# Allegro board JW3651.brd
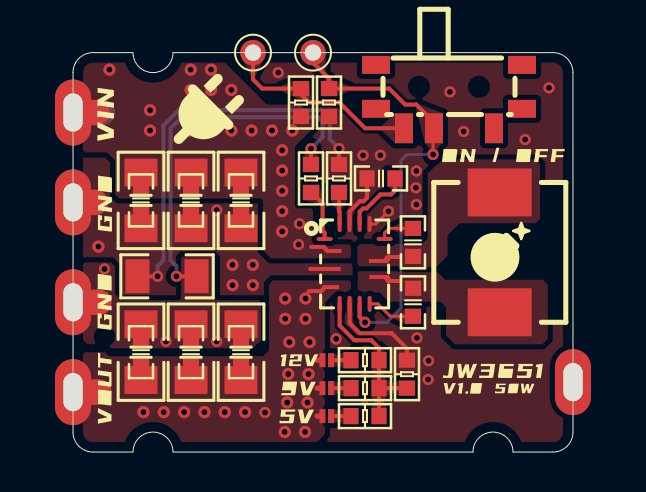
[diagram p0: board, top side]
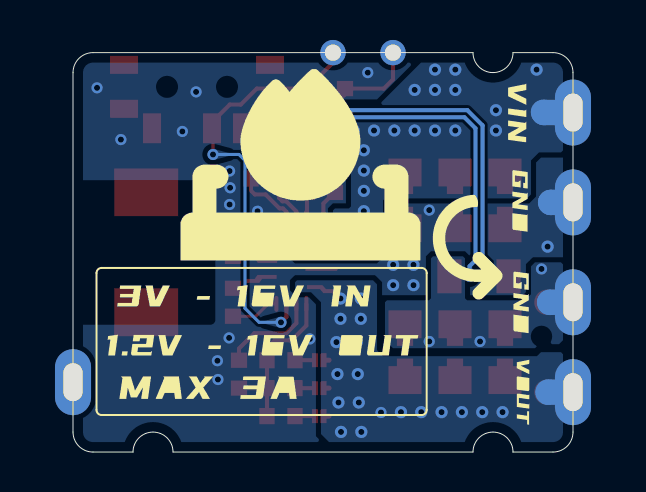
[diagram p1: board, bottom side, seen from below]

Outline 25 x 20 mm; copper layers: TOP, BOTTOM. Coordinates in mm from the lower left corner of the outline.
Outline path: 0,19 arc(0.29,19.71) 1,20 3,20 arc(4,19) 5,20 24,20 arc(24.71,19.71) 25,19 25,1 arc(24.71,0.29) 24,0 22,0 arc(21,1) 20,0 5,0 arc(4,1) 3,0 1,0 arc(0.29,0.29) 0,1 0,19

## Design rules (mm)
constraint set DEFAULT: min track width 0.152
net group N738676: nets N738700 N738731
net group N741418: nets N741418 N741422 N741426 N741599

## Placement (name value [footprint] x y rotation side)
C1  0.1uF  [C0603]  17 7.5 270 top
C2  0.1uF  [C0603]  17 10.5 270 top
C5  22uF  [C1206]  3.4 5 270 top
C6  22uF  [C1206]  5.9 5 270 top
C7  0.1uF  [C0603]  5.9 5 270 top
C8  22uF  [C1206]  3.4 12.6 90 top
C9  22uF  [C1206]  5.9 12.6 90 top
C10  22uF  [C1206]  8.4 12.6 90 top
C12  0.1uF  [C0603]  8.4 12.6 90 top
C13  10uF  [C0603]  15.4 13.7 0 top
C14  1uF  [C0603]  5.9 12.6 90 top
C15  22uF  [C1206]  8.4 5 270 top
C16  0.1uF  [C0603]  3.4 5 270 top
C17  0.1uF  [C0603]  8.4 5 270 top
C18  0.1uF  [C0603]  3.4 12.6 90 top
L1  6.8uH  [IND-SMD_7X6_6MM]  21.34 10 90 top
NOREF  -  []  11.3 1.8 0 top
NOREF#2  -  []  11.4 4.6 0 top
NOREF#3  -  []  1.57 3.28 90 top
NOREF#4  -  []  6.53 16.92 315 top
NOREF#5  -  []  13.64 14.4 0 top
NOREF#6  -  []  22.12 3.68 0 top
NOREF#7  -  []  -9.93 17.29 0 top
NOREF#8  -  []  19 8.9 0 top
NOREF#9  -  []  1 0 90 top
NOREF#10  -  []  20.97 4.74 0 top
NOREF#11  -  []  21.38 10.04 0 top
NOREF#12  -  []  20.75 4.31 0 top
NOREF#13  -  []  18.13 6.43 0 top
NOREF#14  -  []  -12.55 14.62 0 top
NOREF#15  -  []  11.4 3.2 0 top
NOREF#16  -  []  -11.68 12.38 0 top
NOREF#17  -  []  -12.25 16.67 0 top
NOREF#18  -  []  4.83 10.69 225 top
NOREF#19  -  []  21.51 14.91 0 top
NOREF#20  -  []  21.99 2.95 0 top
NOREF#21  -  []  -7.8 3.58 0 top
NOREF#22  -  []  -8.75 7.94 0 top
NOREF#23  -  []  -9.41 14.41 0 top
NOREF#24  -  []  0 19 0 top
R1  Short  [SHORT]  12.7 4.6 270 top
R2  Short  [SHORT]  12.7 1.8 270 top
R3  Short  [SHORT]  12.7 3.2 270 top
R4  100K  [R0603]  14.6 4.6 180 top
R5  255K  [R0603]  14.6 1.8 180 top
R6  350K  [R0603]  14.6 3.2 180 top
R7  22K  [R0603]  16.7 3.9 90 top
R9  2.2K  [R0603]  13.3 13.7 270 top
R10  2.2K  [R0603]  11.9 13.7 270 top
R11  10K  [R0603]  11.4 17.5 270 top
R12  10K  [R0603]  12.8 17.5 90 top
R13  10m  [R1206]  4.7 8.8 0 top
S1  SK-3296S-01-L3  [SW_SMD_SK-3296S]  18.8 17.8 180 top
TP1  HOLE  [POWER_PAD]  0 3 270 top
TP2  HOLE  [POWER_PAD]  0 17 270 top
TP3  HOLE  [POWER_PAD]  0 12.5 270 top
TP4  HOLE  [POWER_PAD]  0 7.5 270 top
TP5  HOLE  [TP_HOLE]  9 20 0 top
TP6  HOLE  [TP_HOLE]  12 20 0 top
TP7  HOLE  [POWER_PAD]  25 3.5 270 top
U1  -  [JW3651]  13.89 9.42 270 top

## Library data of the parts
C1 C2 C5-C10 C12-C18 = C
L1 = L
R1-R7 R9-R13 = R
S1 = SW_SMD_sk-3296s
TP1-TP7 = TP
U1 = JW3651

## Footprints (pads in the part's own frame, mm; a bottom-side part is the same pattern mirrored in y, then rotated)
C0603
  rect 0.762x0.813 smd: 1(-0.7,0) 2(0.7,0)
C1206
  rect 1.397x1.651 smd: 1(-1.397,0) 2(1.397,0)
IND-SMD_7X6_6MM
  rect 2.4x3.2 smd: 1(-3,0) 2(3,0)
JW3651
  oval 0.2x0.8 smd: 1(-1.25,-1.308) 11(-1.25,1.692)
  custom 0.4x1.62 smd: 2(-0.749,-1.27) 4(1.262,-1.397)
  custom 0.2x1.62 smd: 3(0.252,-1.321)
  oval 0.8x0.2 smd: 5(2,-0.558) 6(2,-0.058) 7(2,0.442) 8(2,0.942) 12(-2,0.942) 13(-2,0.442) 14(-2,-0.058) 15(-2,-0.558)
  custom 0.4x1.65 smd: 9(0.752,1.753) 10(-0.249,1.727)
POWER_PAD
  oval 3.302x1.803 hole 1.905x0.965: 1(0,0)
R0603
  rect 0.762x0.813 smd: 1(-0.7,0) 2(0.7,0)
R1206
  rect 1.207x1.701 smd: 1(-1.479,0) 2(1.479,0)
SHORT
  rect 0.7x0.3 smd: 1(0,0.203) 2(0,-0.229)
SW_SMD_SK-3296S
  rect 0.9x1.5 smd: 1(-2.25,1.587) 2(0.75,1.587) 3(2.25,1.587)
  rect 1.4x0.9 smd: 4(-3.65,-1.587) 5(3.65,-1.587) 6(-3.65,0.612) 7(3.65,0.612)
TP_HOLE
  round 1.27 hole 0.813: 1(0,0)

## Nets
GND: C8.1 C9.1 C10.1 C12.1 C13.1 C14.1 C18.1 R7.2 R9.1 R12.1 R13.1 TP3.1 U1.3 U1.6 U1.12 U1.14
VIN: C8.2 C9.2 C10.2 C12.2 C14.2 C18.2 R11.2 TP2.1 U1.2
VO-: C5.1 C6.1 C7.1 C15.1 C16.1 C17.1 R10.1 R13.2 TP4.1
VOUT: C5.2 C6.2 C7.2 C15.2 C16.2 C17.2 R1.2 R2.2 R3.2 TP1.1 U1.4(\VO\)
N738676: C2.2 L1.2 U1.10
N738688: C1.1 L1.1 U1.9
N738700: C1.2 U1.8
N738731: C2.1 U1.11
N739028: R12.2 S1.2 TP6.1 U1.7
N739707: C13.2 U1.13
N741418: R1.1 R4.2
N741422: R2.1 R5.2
N741426: R3.1 R6.2
N741599: R4.1 R5.1 R6.1 R7.1 U1.5
N744516: R9.2 U1.15
N744535: R10.2 U1.1
N746619: R11.1 S1.3 TP5.1

Pads without a net: S1 1 4 5 6 7; TP7 1

## Via types
v1: diameter 0.559, hole 0.305, TOP to BOTTOM, 28 vias
v2: diameter 0.61, hole 0.305, TOP to BOTTOM, 42 vias

## Routing (per net, layer and track width the routed paths; a pad name or vN(x,y) marks a point on that pad's centre or on a via; arc(x,y) is an arc through that point)
GND: length 31.1
  TOP w0.152: v1(15.77,12.06) 15.14,11.42 U1.12
  TOP w0.203: U1.6 13.83,6.45 14.33,5.95 15.93,5.95 16.7,5.18 R7.2 ; R13.1 v1(4.23,8.8) ; U1.14 13.83,12.05 14.34,12.56 14.53,12.56 14.7,12.73 C13.1 ; R9.1 v1(13.3,15.2)
  TOP w1.27: TP3.1 1.1,12.5
  BOTTOM w0.203: v1(13.3,15.2) 12.84,15.66 12.84,16.69 12.4,17.12 5.28,17.12 4.52,16.36 4.52,9.6 4.23,9.31 v1(4.23,8.8)
  BOTTOM w1.27: 1.12,12.5 1.11,12.5 TP3.1
  vias: v1(7.19,12.12) v1(10.26,19) v1(13.16,5.66) v1(14.5,14.86) v1(15.37,14.86) v1(17.14,13.23) v1(17.17,14.07) v1(17.17,12.4) v1(17.2,5.71) v1(17.78,4.57) v1(17.75,3.63) v1(18.85,18.03) v1(19.53,16.05) v1(22.61,15.65) v1(23.8,18.24) v2(1.27,10.29) v2(7.98,9.37) v2(7.98,8.36) v2(8.99,9.37) v2(8.99,8.36)
VIN: length 2.7
  TOP w1.27: TP2.1 1.2,17
  BOTTOM w1.27: TP2.1 1.46,17 1.47,17.02
  vias: v1(11.33,11.43) v1(11.28,10.39) v2(1.82,19.15) v2(3.85,17.12) v2(3.85,16.1) v2(5.88,19.15) v2(5.88,18.13) v2(5.88,16.1) v2(6.9,19.15) v2(6.9,18.13) v2(6.9,16.1) v2(7.92,18.13) v2(7.92,16.1) v2(8.93,16.1) v2(9.95,16.1) v2(10.46,15.11) v2(10.46,14.09) v2(10.46,13.08) v2(10.46,12.06) v2(10.46,11.05) v2(10.96,16.1)
VO-: length 21.3
  TOP w0.203: R10.1 v1(11.9,15.19) ; R13.2 v1(5.17,8.8)
  TOP w1.27: TP4.1 1.3,7.5
  BOTTOM w0.203: v1(11.9,15.19) 12.48,15.77 12.48,16.54 12.26,16.76 5.43,16.76 4.88,16.21 4.88,9.6 5.17,9.31 v1(5.17,8.8)
  BOTTOM w1.27: TP4.1 1.16,7.5 1.17,7.49
  vias: v1(1.57,9.17) v1(4.65,5.54) v1(7.19,5.54)
VOUT: length 3.4
  TOP w0.254: R3.2 12.2,3.2 ; R2.2 12.2,1.8 ; R1.2 12.2,4.6
  TOP w1.27: TP1.1 1.3,3
  BOTTOM w1.27: 1.24,3 1.24,3 TP1.1
  vias: v1(9.6,1.98) v2(3.52,2) v2(4.54,2) v2(5.55,2) v2(6.57,2) v2(7.59,2) v2(8.6,2) v2(10.61,7.69) v2(10.61,6.67) v2(10.58,1.01) v2(10.71,2.48) v2(10.81,5.5) v2(10.76,3.9) v2(11.63,7.69) v2(11.63,6.67) v2(11.6,1.01) v2(11.73,2.48) v2(11.83,5.5) v2(11.78,3.9)
N738700: length 2.4
  TOP w0.152: U1.8 15.24,7.42 15.86,6.8 C1.2
N738731: length 1.8
  TOP w0.152: C2.1 15.81,11.2 15.58,10.97 U1.11
N739028: length 22
  TOP w0.152: v1(18,14.9) 18,16.16 S1.2
  TOP w0.203: S1.2 18.05,16.51 17.16,17.4 16.61,17.4 15.81,18.2 R12.2 12.8,18.7 12,19.5 TP6.1 ; U1.7 14.33,6.76 v1(14.6,6.49)
  BOTTOM w0.152: v1(18,14.9) 16.7,14.9 16.4,14.6 16.4,7.2 15.69,6.49 v1(14.6,6.49)
N739707: length 3.4
  TOP w0.203: U1.13 14.33,12.03 14.5,12.2 14.67,12.2 15.37,12.9 15.91,12.9 16.1,13.09 C13.2
N741418: length 1
  TOP w0.203: R1.1 R4.2
N741422: length 1
  TOP w0.203: R2.1 R5.2
N741426: length 1
  TOP w0.203: R6.2 R3.1
N741599: length 8.3
  TOP w0.203: R6.1 R7.1 ; R6.1 R5.1 ; R6.1 R4.1 15.3,5.21 14.91,5.6 14.19,5.6 14.18,5.6 14.06,5.6 13.33,6.33 U1.5
N744516: length 1.6
  TOP w0.203: U1.15 13.33,12.02 13.3,12.05 R9.2
N744535: length 2.6
  TOP w0.203: U1.1 12.58,10.97 12.48,11.08 12.48,12.45 11.93,13 R10.2
N746619: length 10.1
  TOP w0.203: S1.3 14.61,16.21 13.31,17.51 11.8,17.51 11.4,17.91 R11.1 9.46,18.2 9,18.66 TP5.1

## Copper pours and planes (outline as drawn; the poured copper is in the pictures)
VIN on TOP, BOTTOM: 2.59,19.5 3.13,18.78 4,18.5 4.87,18.78 5.41,19.5 7.6,19.5 9.7,17.4 12,17.4 12.1,17.3 12.1,16.3 11.1,15.3 11.1,12.3 11.2,12.2 11.9,12.2 12,12.1 12,10.5 12.1,10.4 13.8,10.4 13.9,10.3 13.9,9.8 13.8,9.7 9.9,9.7 9.5,10.1 9.5,12.6 9.4,12.7 2.3,12.7 2.1,12.9 2.1,14.6 1.7,15 0.6,15 0.5,15.1 0.5,19 0.65,19.35 1,19.5
VO- on TOP, BOTTOM: 5.5,9.8 7,9.8 7.1,9.7 7.1,7.7 7.2,7.6 9.3,7.6 9.4,7.5 9.4,5.6 9,5.2 1.9,5.2 1.7,5.4 0.7,5.4 0.5,5.6 0.5,9.4 0.6,9.5 1.9,9.5 2.1,9.3 2.1,7.9 2.4,7.6 5.3,7.6 5.4,7.7 5.4,9.7
VOUT on TOP, BOTTOM: 12.2,0.5 5.41,0.5 4.87,1.22 4,1.5 3.13,1.22 2.59,0.5 1,0.5 0.65,0.65 0.5,1 0.5,4.9 0.6,5 1.6,5 1.8,4.8 9.5,4.8 9.8,5.1 9.8,8.4 10,8.6 13.8,8.6 13.9,8.5 13.9,8.2 13.7,8 13.1,8 12.6,7.5 12.6,0.9
N738676 on TOP: 14.32,9.31 16.28,9.31 16.33,9.26 18.16,9.26 18.72,9.82 18.72,10.84 19.34,11.46 23.13,11.46 23.35,11.68 23.35,14.42 23.13,14.65 18.44,14.65 17.74,13.95 17.74,10.71 17.45,10.42 14.35,10.42 14.21,10.29 14.21,9.41
N738688 on TOP: 14.31,9.07 14.24,9 14.24,8.15 14.4,7.99 15.33,7.99 15.7,7.61 15.7,7.59 15.76,7.53 18.38,7.53 18.65,7.25 18.65,5.84 19.1,5.4 23.46,5.4 23.74,5.67 23.74,8.38 23.48,8.63 18.61,8.63 18.17,9.07
GND on TOP: 4.87,18.78 5.41,19.5 24,19.5 24.35,19.35 24.5,19 24.5,13.61 18.14,13.61 17.96,13.54 17.88,13.36 17.88,6.63 17.96,6.45 18.14,6.38 24.5,6.38 24.5,1 24.35,0.65 24,0.5 22.41,0.5 21.87,1.22 21,1.5 20.13,1.22 19.59,0.5 5.41,0.5 4.87,1.22 4,1.5 3.13,1.22 2.59,0.5 1,0.5 0.65,0.65 0.5,1 0.5,19 0.65,19.35 1,19.5 2.59,19.5 3.13,18.78 4,18.5
GND on BOTTOM: 4.87,18.78 5.41,19.5 24,19.5 24.35,19.35 24.5,19 24.5,13.61 18.14,13.61 17.96,13.54 17.88,13.36 17.88,6.63 17.96,6.45 18.14,6.38 24.5,6.38 24.5,1 24.35,0.65 24,0.5 22.41,0.5 21.87,1.22 21,1.5 20.13,1.22 19.59,0.5 5.41,0.5 4.87,1.22 4,1.5 3.13,1.22 2.59,0.5 1,0.5 0.65,0.65 0.5,1 0.5,19 0.65,19.35 1,19.5 2.59,19.5 3.13,18.78 4,18.5 ; 2 cut-outs

Small or netless copper shapes (teardrops, artwork), in the pictures only: 39 on TOP, 6 on BOTTOM
